# Altium PCB TruckCape for Hammond 1455K - Rev4.PcbDoc
Units mil, origin at the board's own origin, x right, y up, seen from the top; angles counter-clockwise.
Board outline 2952.76 x 4725.19 mil, 2 copper layers (Component Side, Bottom Layer), stack 12.8 mil thick; 39 components, 55 nets, 278 pads, 38 vias.
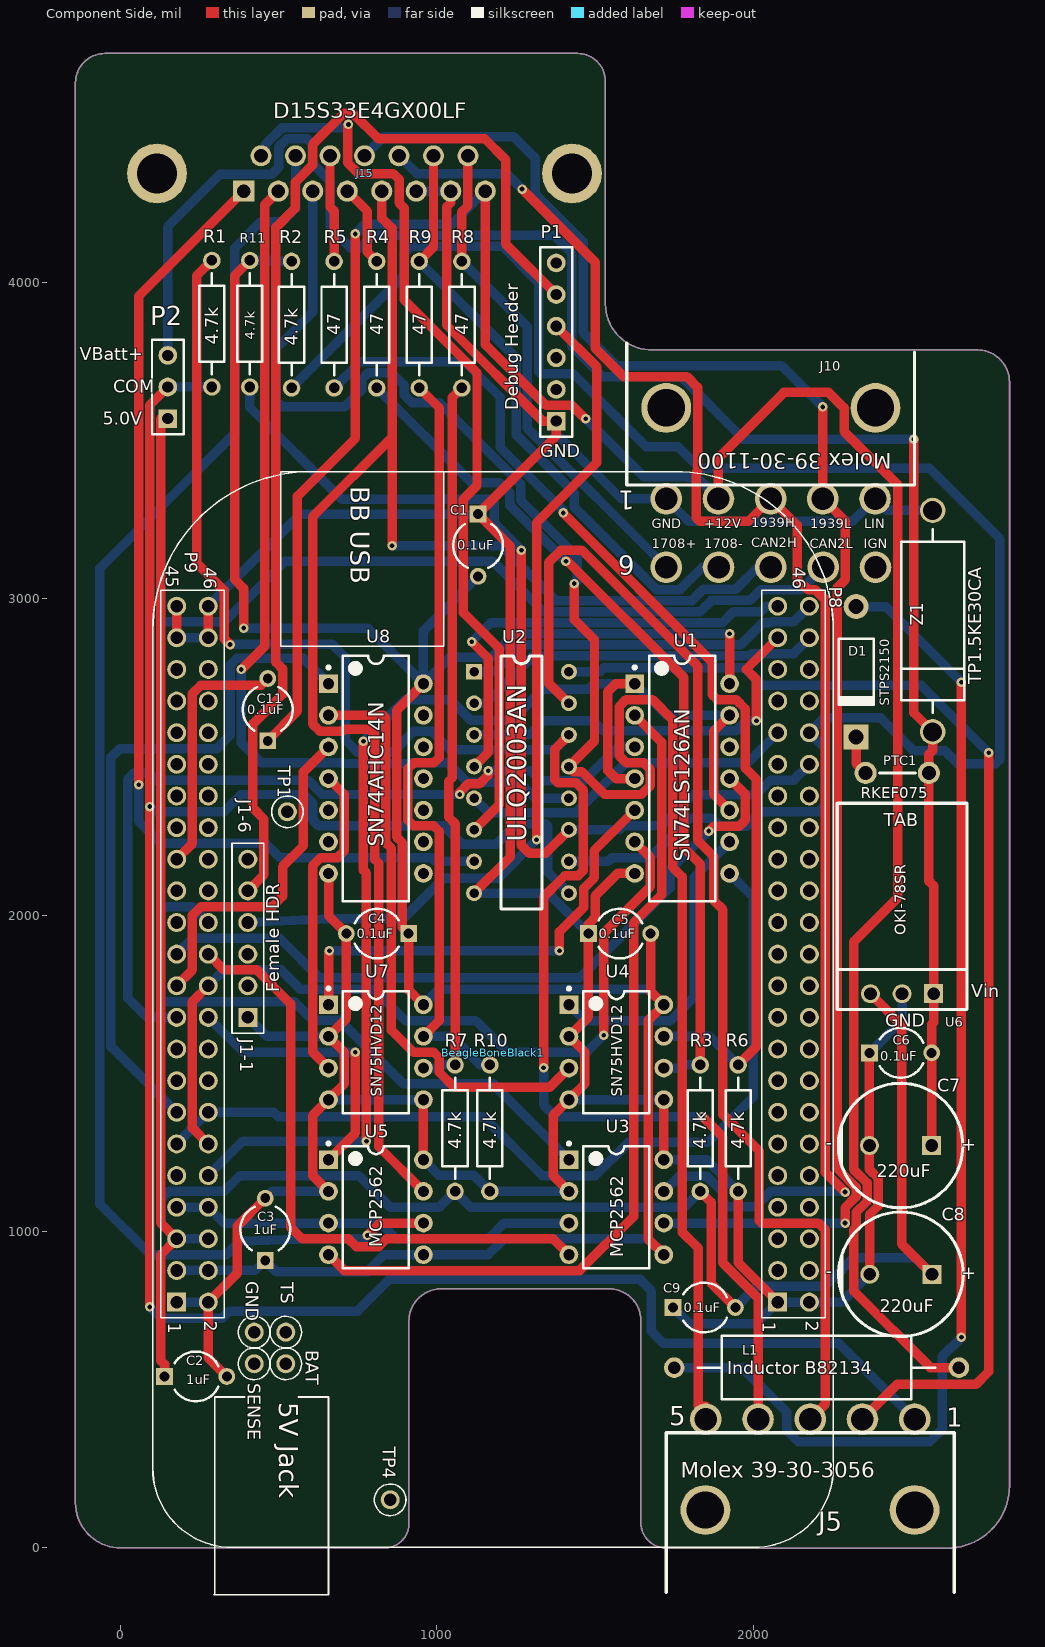
[diagram p0: Component Side view]
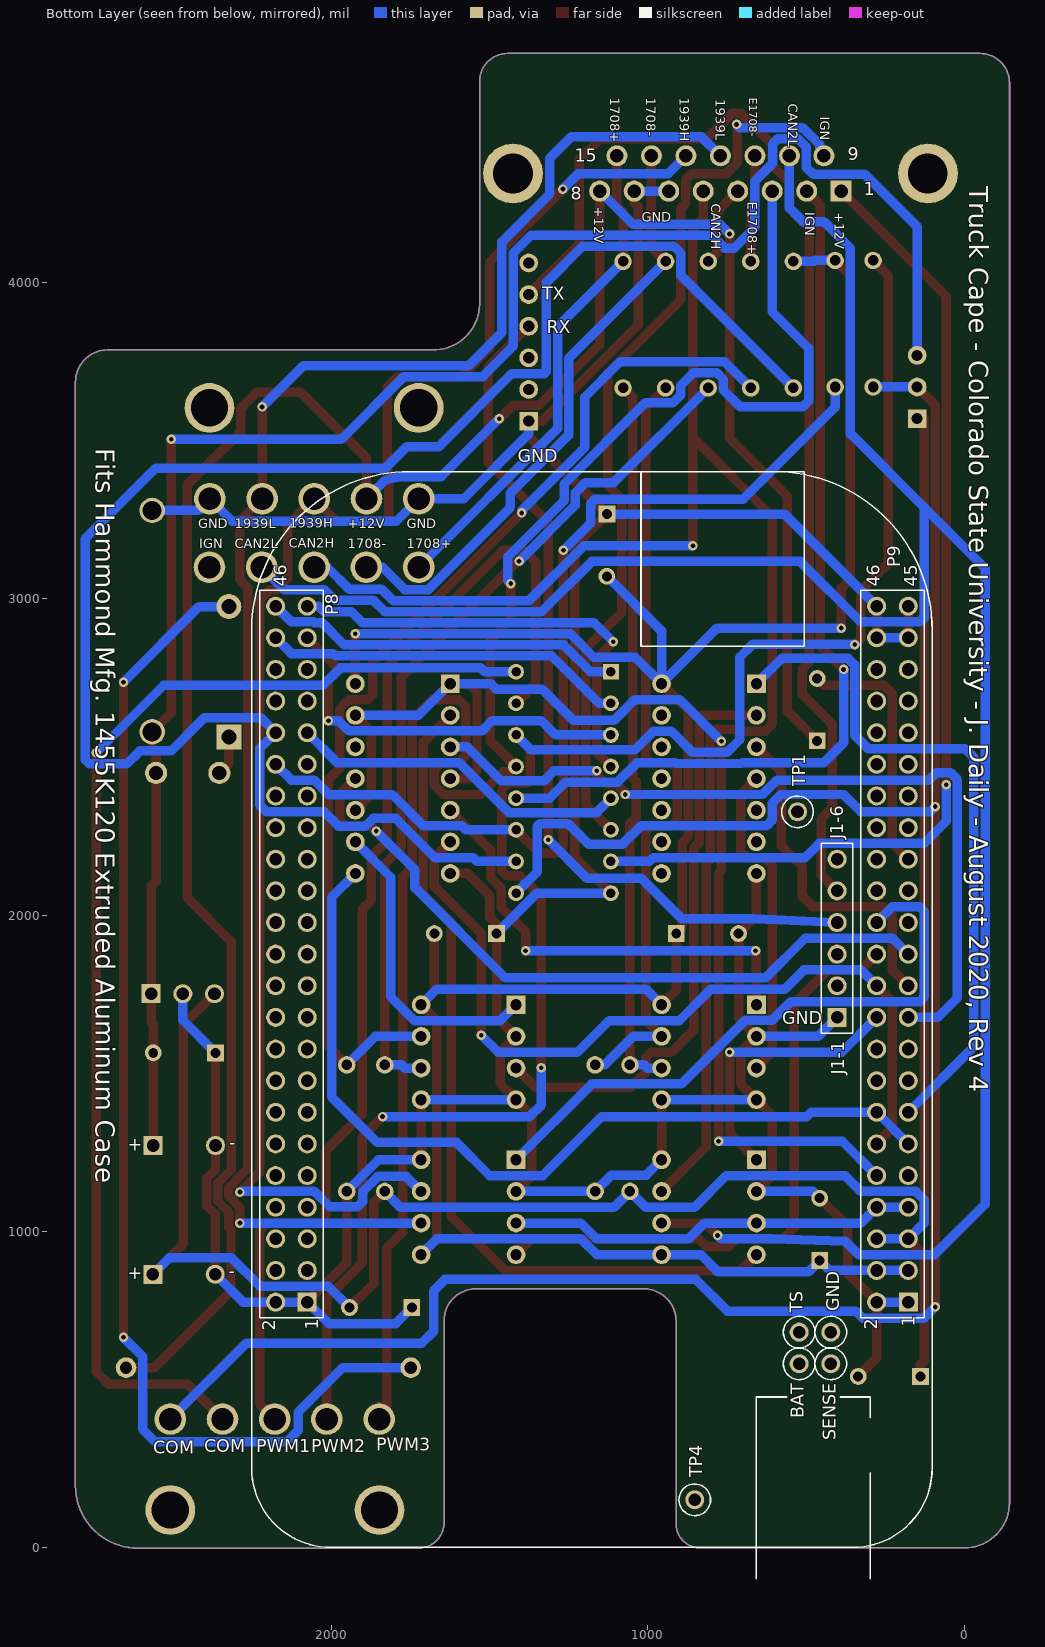
[diagram p1: Bottom Layer view, seen from below]

## Layer stack, top to bottom
Top Solder: solder mask 0.4, Solder Resist, Dk 3.5
Component Side: signal copper 1.4
Dielectric 1: core 10, FR-4, Dk 4.2
Bottom Layer: signal copper 1.4
Solder Side: solder mask 0.4, Solder Resist, Dk 3.5

## Board outline
0.17,0 cw(c0.17,143.03) -142.87,143.03 -142.87,4631.31 cw(c-49.77,4631.31) -49.77,4724.41 1444.44,4724.41 cw(c1444.44,4636.71) 1532.13,4636.71 1532.13,3931.45 1532.15,3931.45 ccw(c1678.95,3933.94) 1681.44,3787.14 1681.45,3787.13 2708.81,3787.13 cw(c2708.5,3685.75) 2809.89,3685.44 2809.89,196.07 cw(c2613.04,196.07) 2613.04,-0.78 1725.78,-0.78 cw(c1725.78,80.77) 1644.23,80.77 1644.23,719.01 ccw(c1544.23,719.01) 1544.23,819.01 1013.23,819.01 ccw(c1013.17,717.07) 911.23,717.13 911.23,76.23 cw(c835,76.23) 835,0

## Design rules (kind name [scope] priority, off if disabled: settings)
Clearance [All] p1: gap=5 ignorepadtopadclearanceinfootprint=FALSE except(0: Arc-Hole Track-Hole SMDPad-Hole THPad-Hole Via-Hole Fill-Hole Poly-Hole Region-Hole Text-Hole)
PolygonConnect [All] p1: connectstyle=Relief reliefconductorwidth=10 reliefentries=4 polygonreliefangle="90 Angle" airgapwidth=10
RoutingVias [All] p1: holewidth=15 width=30 viastyle="Through Hole" minholewidth=13 minwidth=20 maxholewidth=20 maxwidth=30
SolderMaskExpansion [All] p1: expansion=4
Width [All] p1: maxlimit=100 minlimit=10 preferedwidth=30 minimp=50.000000 maximp=50.000000 favimp=50.000000
30 further rules are at their usual default settings.

## Components (designator, comment, footprint, x,y, rotation, side; value= is the part's Value field where it differs from the comment)
BeagleBoneBlack1 "BeagleBoneBlack" Beagleboneblack -332.87,1530.63 r270 top locked
C1 "0.1uF" CAPR5-4X5 1130,3170 r270 top
C2 "1uF" CAPR5-4X5 237.13,542.13 r0 top
C3 "1uF" CAPR5-4X5 457.13,1007.13 r90 top
C4 "0.1uF" CAPR5-4X5 812.13,1942.13 r180 top
C5 "0.1uF" CAPR5-4X5 1577.13,1942.13 r0 top
C6 "0.1uF" CAPR5-4X5 2465.56,1565 r0 top
C7 "220uF" "Elec. Cap 5 x 10mm" 2563.98,1272.13 r180 top
C8 "220uF" "Elec. Cap 5 x 10mm" 2565,865 r180 top
C9 "0.1uF" CAPR5-4X5 1845,760 r0 top
C11 "0.1uF" CAPR5-4X5 465,2650 r90 top
D1 "STPS2150" DO-41 2325,2770 r270 top
J5 "Molex 39-30-3056" "5 POS MINI-FIT JR R/A Header" 2510,407.4 r0 top
J10 "10 Pos Mini-Fit Jr." "10 pos Mini-Fit Jr. R/A Header" 1724.82,3316.61 r180 top locked
J15 "Vehicle Interface" DB15 771.91,4401.02 r0 top
L1 "Inductor B82134" AXIAL-0.9 2200,570 r180 top
P1 "Use this part in J1-1 to J1-6" HDR1X6 1377.13,3562.13 r90 top
P2 "Header 3" HDR1X3 149.13,3570 r90 top
PTC1 "RKEF075" PTC 2480,2450 r0 top
R1 "4.7k" Axial-0.4 288.27,3870 r270 top
R2 "4.7k" Axial-0.4 540.4,3867.13 r90 top
R3 "4.7k" Axial-0.4 1832.13,1327.13 r270 top
R4 "47" Axial-0.4 809.55,3867.13 r90 top
R5 "47" Axial-0.4 674.97,3867.13 r90 top
R6 "4.7k" Axial-0.4 1952.13,1327.13 r270 top
R7 "4.7k" Axial-0.4 1057.13,1327.13 r270 top
R8 "47" Axial-0.4 1078.69,3867.13 r90 top
R9 "47" Axial-0.4 944.12,3867.13 r90 top
R10 "4.7k" Axial-0.4 1167.13,1327.13 r270 top
R11 "4.7k" Axial-0.4 408.27,3870 r90 top
U1 "SN74LS126AN" N14A 1775,2432.13 r0 top
U2 "ULQ2003AN" DIP16 1117.13,2770 r0 top
U3 "MCP2562" PDIP300-P8 1567.13,1077.13 r0 top locked
U4 "SN75HVD12" PDIP300-P8 1567.13,1567.13 r0 top locked
U5 "MCP2562" PDIP300-P8 807.13,1077.13 r0 top locked
U6 "OKI-78SR" OKI-78SR 2370.28,1752.13 r0 top
U7 "SN75HVD12" PDIP300-P8 807.13,1567.13 r0 top locked
U8 "SN74AHC14N" N14A 807.13,2432.13 r0 top locked
Z1 "TP1.5KE30CA" DIODE-0.7 2567.13,2930 r270 top

## Footprints (in the part's own frame and the unit in brackets; to place one, negate y for a bottom-side part, rotate by r counter-clockwise, add the part's x,y. Pads: shape width x height; smd on the part's side, far side on the other; paste and mask are expansions set on the pad)
"5 POS MINI-FIT JR R/A Header" [mil]
  round 157.48 hole 118.11: 0(-661.42,-287.4) 0(0,-287.4)
  round 100 hole 71: 1(0,0) 2(-165,0) 3(-330,0) 4(-495,0) 5(-660,0)
  silkscreen extent -785,-547 125,-43
"10 pos Mini-Fit Jr. R/A Header" [mil] "Molex 10 position Mini-Fit Jr. Right Angle Header with Pegs, Series 5569"
  round 157.48 hole 118.11: 0(-661.42,-287.4) 0(0,-287.4)
  round 100 hole 71: 1(0,0) 2(-165,0) 3(-330,0) 4(-495,0) 5(-660,0) 6(0,216.53) 7(-165.36,216.53) 8(-330.71,216.53) 9(-496.06,216.53) 10(-661.42,216.53)
  silkscreen extent -785,-491 125,-43
Axial-0.4 [mm] "Axial Device, Thru-Hole; 2 Leads; 0.4 in Pin Spacing"
  round 1.4 hole 0.85: 1(-5.08,0) 2(5.08,0)
  silkscreen extent -4.06,-1.02 4.06,1.02
AXIAL-0.9 [mm] "Axial Device, Thru-Hole; 2 Leads; 0.9 in Pin Spacing"
  round 1.65 hole 1: 1(-11.43,0) 2(11.43,0)
  silkscreen extent -9.53,-2.54 9.53,2.54
Beagleboneblack [mil] "Flipped Headers, testpoints and Overlay for a BBB Rev C"
  rect 60x60 hole 40 mask+2: 1(753.5,510) J1-1(-146.5,735) P1(753.5,2410)
  round 60 hole 40 mask+2: 2(753.5,610) 3(653.5,510) 4(653.5,610) 5(553.5,510) 6(553.5,610) 7(453.5,510) 8(453.5,610) 9(353.5,510) 10(353.5,610) 11(253.5,510) 12(253.5,610) 13(153.5,510) 14(153.5,610) 15(53.5,510) 16(53.5,610) 17(-46.5,510) 18(-46.5,610) 19(-146.5,510) 20(-146.5,610) 21(-246.5,510) 22(-246.5,610) 23(-346.5,510) 24(-346.5,610) 25(-446.5,510) 26(-446.5,610) 27(-546.5,510) 28(-546.5,610) 29(-646.5,510) 30(-646.5,610) 31(-746.5,510) 32(-746.5,610) 33(-846.5,510) 34(-846.5,610) 35(-946.5,510) 36(-946.5,610) 37(-1046.5,510) 38(-1046.5,610) 39(-1146.5,510) 40(-1146.5,610) 41(-1246.5,510) 42(-1246.5,610) 43(-1346.5,510) 44(-1346.5,610) 45(-1446.5,510) 46(-1446.5,610) J1-2(-246.5,735) J1-3(-346.5,735) J1-4(-446.5,735) J1-5(-546.5,735) J1-6(-646.5,735) P2(753.5,2510) P3(653.5,2410) P4(653.5,2510) P5(553.5,2410) P6(553.5,2510) P7(453.5,2410) P8(453.5,2510) P9(353.5,2410) P10(353.5,2510) P11(253.5,2410) P12(253.5,2510) P13(153.5,2410) P14(153.5,2510) P15(53.5,2410) P16(53.5,2510) P17(-46.5,2410) P18(-46.5,2510) P19(-146.5,2410) P20(-146.5,2510) P21(-246.5,2410) P22(-246.5,2510) P23(-346.5,2410) P24(-346.5,2510) P25(-446.5,2410) P26(-446.5,2510) P27(-546.5,2410) P28(-546.5,2510) P29(-646.5,2410) P30(-646.5,2510) P31(-746.5,2410) P32(-746.5,2510) P33(-846.5,2410) P34(-846.5,2510) P35(-946.5,2410) P36(-946.5,2510) P37(-1046.5,2410) P38(-1046.5,2510) P39(-1146.5,2410) P40(-1146.5,2510) P41(-1246.5,2410) P42(-1246.5,2510) P43(-1346.5,2410) P44(-1346.5,2510) P45(-1446.5,2410) P46(-1446.5,2510) TP1(-796.5,860) TP4(1378.5,1185) TP5(948.5,855) TP6(948.5,755) TP7(848.5,855) TP8(848.5,755)
  silkscreen extent -1872,434 1678,2586
CAPR5-4X5 [mm] "Capacitor; 2 Leads"
  rect 1.35x1.35 hole 0.8: 1(-2.5,0)
  round 1.35 hole 0.8: 2(2.5,0)
  silkscreen extent -1.69,-2 1.82,2
DB15 [mm]
  rect 1.69x1.69 hole 1.09: 1(-9.72,-2.843)
  round 1.69 hole 1.09: 2(-6.95,-2.843) 3(-4.18,-2.843) 4(-1.41,-2.843) 5(1.36,-2.843) 6(4.13,-2.843) 7(6.9,-2.843) 8(9.67,-2.843) 9(-8.335,-0.003) 10(-5.565,-0.003) 11(-2.795,-0.003) 12(-0.025,-0.003) 13(2.745,-0.003) 14(5.515,-0.003) 15(8.285,-0.003)
  round 4.8 hole 3.18: 16(-16.685,-1.423) 17(16.635,-1.423)
DIODE-0.7 [mil] "Diode, Thru-Hole; 2 Leads; 0.7 in Pin Spacing"
  round 80 hole 60: 1(-350,0) 2(350,0)
  silkscreen extent -290,-100 290,100
DIP16 [mil]
  rect 50x50 hole 30: 1(0,0)
  round 50 hole 30: 2(0,-100) 3(0,-200) 4(0,-300) 5(0,-400) 6(0,-500) 7(0,-600) 8(0,-700) 9(300,-700) 10(300,-600) 11(300,-500) 12(300,-400) 13(300,-300) 14(300,-200) 15(300,-100) 16(300,0)
  silkscreen extent 85,-750 215,50
DO-41 [mm] "Diode, Axial; Body 5.2 x 2.7 mm (LxDia. max), Lead Dia. 0.86 mm (max)"
  round 2 hole 1.2: 1(-5.23,0)
  rect 2x2 hole 1.2: 2(5.23,0)
  silkscreen extent -2.65,-1.4 2.75,1.4
"Elec. Cap 5 x 10mm" [mil] "2 lead polarized Radial Capacitor with 5 mm lead spacing and 10 mm diameter can"
  rect 60x60 hole 40: 1(0,0)
  round 60 hole 40: 2(196.85,0)
  silkscreen extent -98,-197 295,197
HDR1X3 [mm] "Connector; Header; 3 Position"
  rect 1.5x1.5 hole 0.9: 1(0,0)
  round 1.5 hole 0.9: 2(2.54,0) 3(5.08,0)
  silkscreen extent -1.27,-1.27 6.35,1.27
HDR1X6 [mm] "Connector; Header; 6 Position"
  rect 1.5x1.5 hole 0.9: 1(0,0)
  round 1.5 hole 0.9: 2(2.54,0) 3(5.08,0) 4(7.62,0) 5(10.16,0) 6(12.7,0)
  silkscreen extent -1.27,-1.27 13.97,1.27
N14A [mm] "DIP, 14-Leads, Row Spacing 7.62mm, Pitch 2.54mm, Body 19.18x6.35mm"
  rect 1.5x1.5 hole 0.9: 1(-3.81,7.62)
  round 1.5 hole 0.9: 2(-3.81,5.08) 3(-3.81,2.54) 4(-3.81,0) 5(-3.81,-2.54) 6(-3.81,-5.08) 7(-3.81,-7.62) 8(3.81,-7.62) 9(3.81,-5.08) 10(3.81,-2.54) 11(3.81,0) 12(3.81,2.54) 13(3.81,5.08) 14(3.81,7.62)
  silkscreen extent -3.93,-9.85 2.65,9.85, body extent -3.55,-9.85 3.55,9.85, height 5.08
OKI-78SR [mil] "Horizontal Mount SIP DC/DC Converter"
  rect 60x60 hole 40: 1(200,0)
  round 60 hole 40: 2(100,0) 3(0,0)
  silkscreen extent -105,-50 305,602
PDIP300-P8 [mm] "DIP, 8-Leads, Row Spacing 7.62mm, Pitch 2.54mm, Body 9.5x6.6mm"
  rect 1.5x1.5 hole 0.9: 1(-3.81,3.81)
  round 1.5 hole 0.9: 2(-3.81,1.27) 3(-3.81,-1.27) 4(-3.81,-3.81) 5(3.81,-3.81) 6(3.81,-1.27) 7(3.81,1.27) 8(3.81,3.81)
  silkscreen extent -3.93,-4.9 2.65,5.23, body extent -3.55,-4.9 3.55,4.9, height 4.32
PTC [mil] "TE RGEF600-2"
  round 70 hole 45: 1(-125,0) 2(75,0)
  silkscreen extent -80,0 33,0

## Part data
BeagleBoneBlack1: "46 Positions Header, Breakaway Connector 0.100\" (2.54mm) Through Hole Tin", Manufacturer="Sullins Connector Solutions", PartNumber=PREC023DAAN-RC, Supplier Part Number 1=S2012EC-23-ND, Supplier 1=Digi-Key
C1 C4 C5 C6 C9 C11: library part Cap, "CAP CER 0.1UF 100V X7R RADIAL", Manufacturer="Vishay BC Components", PartNumber=K104K20X7RH53H5, Supplier Part Number 1=BC5139-ND, Supplier 1=Digi-Key
C2 C3: library part Cap, "CAP CER 1UF 100V X7R RADIAL", Manufacturer="Murata Electronics North America", PartNumber=RDER72A105K2M1H03A, Supplier Part Number 1=490-9198-1-ND, Supplier 1=Digi-Key
C7 C8: library part "Electrolytic Cap", "220µF 50V Aluminum Electrolytic Capacitors Radial, Can 175 mOhm @ 10kHz 5000 Hrs @ 105°C", Manufacturer="EPCOS (TDK)", PartNumber=B41858C6227M000, Supplier Part Number 1=495-6000-ND, Supplier 1=Digi-Key
D1: library part "Diode 1N4003", "Diode Schottky 150V 2A Through Hole DO-15", Manufacturer=STMicroelectronics, Supplier Part Number 1=497-3213-1-ND, PartNumber=STPS2150, Supplier 1=Digi-Key
J5: library part "5 Pos Header", "5 Positions Header Connector 0.165\" (4.20mm) Through Hole - Right Angle Tin", Manufacturer=Molex, PartNumber=39-30-3055, Supplier Part Number 1=WM18448-ND, Supplier 1=Digi-Key
J10: library part "10 Pos Header", "10 Positions Header Connector 0.165\" (4.20mm) Through Hole - Right Angle Tin", Manufacturer=Molex, PartNumber=39-30-1100, Supplier Part Number 1=WM1355-ND, Supplier 1=Digi-Key
J15: library part 788781-2, "Receptacle Assembly, 15 Position, Right Angle, 8.08mm Series, Amplimite, with Screwlocks", Manufacturer="Amphenol FCI", PartNumber=D15S33E4GX00LF, Supplier Part Number 1=609-1499-ND, Supplier 1=Digi-Key
L1: library part "Inductor Iron", "Magnetic-Core Inductor", Manufacturer="TDK Electronics Inc.", PartNumber=B82134A5701M000, Supplier Part Number 1=495-76036-1-ND, Supplier 1=Digi-Key
P1: library part "Header 6", "CONN HEADER FEMALE 6POS .1\" GOLD", Manufacturer="Sullins Connector Solutions", PartNumber=PPPC061LFBN-RC, Supplier Part Number 1=S7039-ND, Supplier 1=Digi-Key
P2: "2 (1 x 2) Position Shunt Connector Black Open Top 0.100\" (2.54mm) Gold", Manufacturer="Sullins Connector Solutions", PartNumber=QPC02SXGN-RC, Supplier Part Number 1=S9337-ND, Supplier 1=Digi-Key
PTC1: library part "SMD Resistor", "Polymeric PTC Resettable Fuse 60V 750mA Ih Through Hole Radial, Disc", Manufacturer="Littelfuse Inc.", Supplier Part Number 1=RKEF075HF-ND, PartNumber=RKEF075, Supplier 1=Digi-Key
R1 R2 R3 R6 R7 R10 R11: library part "Chip Resistor", "RES SMD 4.7K OHM 1% 1/10W 0603", Manufacturer=Yageo, PartNumber=CFR-25JB-52-4K7, Supplier Part Number 1=4.7KQBK-ND, Supplier 1=Digi-Key
R4 R5 R8 R9: library part "Chip Resistor", "47 Ohms ±5% 0.25W, 1/4W Through Hole Resistor Axial  Carbon Film", Manufacturer=Yageo, PartNumber=CFR-25JB-52-47R, Supplier Part Number 1=47QBK-ND, Supplier 1=Digi-Key
U1: library part DM74LS126AN, "Quad 3-State Buffer", Manufacturer="Texas Instruments", Supplier Part Number 1=296-3643-5-ND, PartNumber=SN74LS126AN, Supplier 1=Digi-Key
U2: library part ULQ2003, "High voltage, high current Darlington arrays each containing seven open collector Darlington pairswith common emitters.", Manufacturer="Texas Instruments", Supplier Part Number 1=296-22623-5-ND, PartNumber=ULQ2003AN, Supplier 1=Digi-Key
U3 U5: library part SN65HVD232DR, "1/1 Transceiver Half CAN 8-PDIP", Manufacturer="Microchip Technology", PartNumber=MCP2562-E/P, Supplier Part Number 1=MCP2562-E/P-ND, Supplier 1=Digi-Key
U4 U7: library part "SN75HVD12D (3.3v RS485)", "IC 3.3V DIFF TXRX 8-SOIC", Manufacturer="Texas Instruments", PartNumber=SN75HVD12P, Supplier Part Number 1=296-14047-5-ND, Supplier 1=Digi-Key
U6: library part 7805, "5V DC/DC Converter (7805 replacement)", Manufacturer="Murata Power Solutions Inc.", PartNumber=OKI-78SR-5/1.5-W36H-C, Supplier Part Number 1=811-2692-ND, Supplier 1=Digi-Key
U8: library part "74VHC14 Hex Inverter", "Inverter IC 6 Channel Schmitt Trigger 14-PDIP", Manufacturer="Texas Instruments", Supplier Part Number 1=296-4550-5-ND, PartNumber=SN74AHC14N, Supplier 1=Digi-Key
Z1: library part Zener, "TVS DIODE 25.6V 41.4V DO201", Manufacturer="Littelfuse Inc.", Supplier Part Number 1=F7610CT-ND, PartNumber=TP1.5KE30CA, Supplier 1=Digi-Key

## Via types
v1: diameter 30, hole 15, Component Side to Bottom Layer, 38 vias

## Nets (pads, with @x,y where several pads share a name; then routed paths per layer and width w, separated by ;. In a path a pad name is that pad's centre, name@x,y a point inside that pad or via, vN(x,y) a via of type N, cw(c..) or ccw(c..) an arc to the next point about the centre after c; other vN are vias at no path point)
3V3: BeagleBoneBlack1.3 BeagleBoneBlack1.4 C1.2 C3.1 C4.1 C5.2 R2.2 R11.2 U1.14 U3.5 U4.8 U5.5 U7.8 U8.14 | length 8161.3
  Component Side w30: v1(388.8,2907.95) 388.8,3033.32 359.98,3062.13 359.98,4021.71 R11.2 ; U7.8 910.56,1763.71 C4.1 890.98,1961.71 890.98,2229.23 872.61,2247.6 872.61,2647.6 U8.14 ; C5.2 1675.56,1758.71 U4.8 1667.61,1667.6 1667.61,976.66 U3.5 ; U1.14 v1(1925,2889.76)
  Bottom Layer w30: BeagleBoneBlack1.3 BeagleBoneBlack1.4 425.56,877.13 C3.1 493.08,872.76 778.98,872.76 833.35,927.13 U5.5 1161.98,927.13 1211.61,976.76 1667.5,976.76 U3.5 ; v1(388.8,2907.95) 781.32,2907.95 U8.14 ; R11.2 471.98,4070 474.85,4067.13 R2.2 ; U7.8 1006.76,1766.76 1667.5,1766.76 U4.8 ; C1.2 957.13,2898.71 U8.14 ; v1(1925,2889.76) 1245.46,2889.76 1171.46,2815.76 1040.76,2815.76 U8.14
5V0: BeagleBoneBlack1.5 BeagleBoneBlack1.6 C2.1 C8.1 C9.2 P2.1 R3.2 R7.2 U6.3 | length 7270.4
  Component Side w30: C2.1 138.71,580.04 126.98,591.76 126.98,926.98 BeagleBoneBlack1.5 126.98,1027.28 126.98,3570 P2.1 ; R3.2 1867.11,1092.16 1867.11,836.32 C9.2 ; U6.3 2468.98,1653.43 2468.98,961.02 C8.1
  Bottom Layer w30: BeagleBoneBlack1.6 BeagleBoneBlack1.5 126.98,1027.28 126.98,1100.76 153.35,1127.13 326.98,1127.13 376.61,1176.76 752.98,1176.76 852.98,1076.76 1006.76,1076.76 R7.2 1107.5,1076.76 1781.76,1076.76 R3.2 ; C9.2 2010.56,827.13 2226.98,827.13 2316.61,916.76 2513.24,916.76 C8.1
12V0: C6.2 C7.1 P2.3 PTC1.2 U6.1 Z1.2 | length 5909.9
  Component Side w30: v1(2506.98,3504.76) 2506.98,2640.15 Z1.2 2567.13,2520.9 2555,2508.76 PTC1.2 2555,2108.04 2570.28,2092.76 U6.1 2570.28,1661.06 2563.98,1654.76 C6.2 C7.1
  Bottom Layer w30: P2.3 149.13,4176.91 314.98,4342.76 477.98,4342.76 499.53,4364.31 499.53,4428.76 524.94,4454.17 589.98,4454.17 606.06,4438.09 606.06,4376.68 661.98,4320.76 661.98,4174.76 727.98,4108.76 755.98,4108.76 796.98,4149.76 1369.66,4149.76 1426.66,4092.76 1426.66,3798.62 1522.52,3702.76 1770.99,3702.76 1968.98,3504.76 v1(2506.98,3504.76)
CAN2H: J10.8 J15.5 U5.7 | length 5181.9
  Component Side w30: J15.5 825.43,4203.76 857.98,4171.21 857.98,3510.76 ; v1(857.98,3167.76) 857.98,3510.76 ; U5.7 815.98,1268.28 815.98,2164.23 802.61,2177.6 802.61,2572.76 786.61,2588.76 706.98,2588.76 699.98,2581.76 629.98,2581.76 606.98,2604.76 606.98,3259.76 857.98,3510.76
  Bottom Layer w30: v1(857.98,3167.76) 1202.98,3167.76 1375.98,2994.76 1805.98,2994.76 1841.3,3030.08 1943.98,3030.08 2013.98,3100.08 J10.8
CAN2L: J10.9 J15.10 U5.6 | length 7388.3
  Component Side w30: v1(779.98,987.76) 819.35,1027.13 U5.6
  Bottom Layer w30: J15.10 552.8,4235.58 509.98,4192.76 443.98,4192.76 359.98,4108.76 359.98,3522.76 126.98,3289.76 ; v1(779.98,987.76) 768.98,976.76 611.98,976.76 375.98,968.76 334.35,927.13 93.98,927.13 -66.02,1087.13 -66.02,3096.76 126.98,3289.76 ; J10.9 2150.56,3029.76 2023.69,3029.76 1989.01,2995.08 1867.62,2995.08 1832.31,2959.76 1335.98,2959.76 1176.98,3118.76 518.98,3118.76 327.35,2927.13 140.61,2927.13 126.98,2940.76 126.98,3289.76
COM: J5.1 P2.2 R1.2 U2.9 | length 7465.4
  Component Side w30: v1(91.98,761.76) v1(91.98,2343.76) 91.98,3612.85 P2.2
  Bottom Layer w30: v1(91.98,761.76) 126.98,726.76 320.98,726.76 342.98,748.76 748.98,748.76 848.98,848.76 1641.98,848.76 1677.98,812.76 1677.98,684.76 1714.98,647.76 2269.64,647.76 J5.1 ; v1(91.98,2343.76) 108.61,2327.13 326.98,2327.13 381.61,2381.76 579.78,2381.76 607.61,2353.93 607.61,2300.76 625.76,2282.6 1022.14,2282.6 1079.98,2224.76 1187.98,2224.76 1252.98,2289.76 1341.98,2289.76 1349.98,2281.76 1349.98,2137.15 U2.9 ; P2.2 R1.2
DEBUGRX: BeagleBoneBlack1.J1-4 P1.4 | length 2771.7
  Component Side w30: v1(1314.98,2238.76) 1314.98,3240.79 1505,3430.81 1505,3734.27 P1.4
  Bottom Layer w30: BeagleBoneBlack1.J1-4 666.98,1988.76 892.98,1988.76 1021.98,2117.76 1193.98,2117.76 v1(1314.98,2238.76)
DEBUGTX: BeagleBoneBlack1.J1-5 P1.5 | length 3695.1
  Component Side w30: BeagleBoneBlack1.J1-5 452.98,2127.98 452.98,2303.76 417.98,2338.76 417.98,2604.76 511.98,2698.76 511.98,2778.76 490.83,2799.92 490.83,4174.61 551.98,4235.76 551.98,4316.76 606.98,4371.76 606.98,4436.48 705.5,4535 734.5,4535 814.74,4454.76 1150.98,4454.76 1216.98,4388.76 1216.98,4122.28 P1.5
EJ1708+: J15.4 R4.2 | length 260.6
  Component Side w30: J15.4 779.5,4225.98 779.5,4097.18 R4.2
EJ1708-: J15.11 R5.2 | length 339.2
  Component Side w30: J15.11 661.85,4239.89 674.98,4226.76 R5.2
GND: BeagleBoneBlack1.1 BeagleBoneBlack1.2 BeagleBoneBlack1.43 BeagleBoneBlack1.44 BeagleBoneBlack1.45 BeagleBoneBlack1.46 BeagleBoneBlack1.J1-1 BeagleBoneBlack1.P1 BeagleBoneBlack1.P2 C1.1 C2.2 C3.2 C4.2 C5.1 C6.1 C7.2 C8.2 C9.1 J10.1 J10.5 J15.6 J15.7 P1.1 R6.2 R10.2 U1.7 U2.8 U3.2 U3.8 U4.2 U4.4 U4.5 U5.2 U5.8 U6.2 U7.2 U7.4 U7.5 U8.7 Z1.1 | length 13182.3
  Component Side w30: BeagleBoneBlack1.43 BeagleBoneBlack1.45 ; BeagleBoneBlack1.44 BeagleBoneBlack1.46 ; C2.2 277.13,600.56 BeagleBoneBlack1.2 367.98,867.98 367.98,1016.41 C3.2 ; U5.2 606.98,1177.28 606.98,1366.98 U7.4 706.98,1466.98 706.98,1567.28 U7.2 713.71,1673.71 C4.2 657.13,1998.71 U8.7 ; U5.8 U7.5 ; J15.7 1043.54,4252.32 1030.98,4239.76 1030.98,3865.27 1334.12,3562.13 P1.1 1377.13,3515.56 C1.1 1232.13,3166.29 1232.13,2185 U2.8 ; U3.2 1366.98,1177.28 1366.98,1366.98 U4.4 1466.98,1466.98 1466.98,1567.28 U4.2 1478.71,1678.71 C5.1 1478.71,1971.57 1499.63,1992.5 1499.63,2060.69 1571.07,2132.13 U1.7 ; U3.8 U4.5 ; R6.2 1952.13,902.13 BeagleBoneBlack1.P1 ; C6.1 C7.2 2367.13,1196.36 2395,1168.49 2395,1081.51 2368.15,1054.66 C8.2
  Bottom Layer w30: BeagleBoneBlack1.1 BeagleBoneBlack1.2 ; BeagleBoneBlack1.43 BeagleBoneBlack1.44 ; BeagleBoneBlack1.46 568.43,3268.43 C1.1 ; BeagleBoneBlack1.J1-1 462.13,1617.13 U7.2 ; C3.2 478.71,1127.13 U5.2 ; U7.4 U7.5 ; J15.6 J15.7 ; U5.8 1005.5,1178.76 1115.5,1178.76 R10.2 U3.2 ; U2.8 1350.84,2070 C5.1 ; P1.1 1377.13,3521.86 1582.38,3316.61 J10.1 1795.67,3245.76 2313.97,3245.76 J10.5 2421.43,3280 Z1.1 ; U4.4 U4.5 ; U3.8 1852.13,1227.13 R6.2 ; C9.1 1797.81,708.76 2008.76,708.76 BeagleBoneBlack1.P1 BeagleBoneBlack1.P2 2280.28,777.13 C8.2 ; C6.1 2470.28,1668.15 U6.2
J1708+: J10.6 J15.15 R8.2 | length 1576.5
  Component Side w30: R8.2 1078.69,4223.76 1098.07,4243.14 J15.15
  Bottom Layer w30: R8.2 1285.98,3859.84 1285.98,3538.91 J10.6
J1708-: J10.7 J15.14 R9.2 | length 1925.7
  Component Side w30: R9.2 989.02,4112.03 J15.14
  Bottom Layer w30: R9.2 1250.98,3760.27 1250.98,3518.12 1434.67,3334.43 1434.67,3289.07 1693.98,3029.76 1768.67,3029.76 1838.98,3100.08 J10.7
J1939H: J10.3 J15.13 U3.7 | length 5064.4
  Component Side w30: v1(1268.98,4295.76) 1499.98,4064.76 1499.98,3792.76 1589.98,3702.76 1789.98,3702.76 1823.98,3668.76 1823.98,3404.76 1818.98,3399.76 1818.98,3256.76 1829.98,3245.76 1983.97,3245.76 J10.3 2138.98,3232.45 2138.98,3063.76 2173.98,3028.76 2196.21,3028.76 2227.13,2997.84 2227.13,1187.87 v1(2290,1125)
  Bottom Layer w30: J15.13 936.1,4344.76 1219.98,4344.76 v1(1268.98,4295.76) ; U3.7 1764.69,1174.69 1853.98,1174.69 1901.69,1126.98 1901.69,1095.05 1917.98,1078.76 2005.98,1078.76 2054.35,1127.13 2287.87,1127.13 v1(2290,1125)
J1939L: J10.4 J15.12 U3.6 | length 5293.4
  Component Side w30: v1(2219.82,3606.93) J10.4 2290.98,3245.45 2290.98,3061.76 2265.63,3036.41 2265.63,1198.87 2325,1139.5 2325,1110.5 2290,1075.5 v1(2290,1027.13)
  Bottom Layer w30: J15.12 830.76,4460.76 1242.98,4460.76 1309.98,4393.76 1309.98,4280.76 1461.98,4128.76 1461.98,3841.76 1565.98,3737.76 2088.98,3737.76 v1(2219.82,3606.93) ; U3.6 v1(2290,1027.13)
NetBeagleBoneBlack1_9: BeagleBoneBlack1.9
NetBeagleBoneBlack1_10: BeagleBoneBlack1.10 U1.1 U1.4 U1.10 U1.13 | length 3922.6
  Component Side w30: v1(767.61,2549.76) 767.61,2142.6 776.98,2133.23 v1(776.98,1285.76) ; U1.4 1565.98,2432.13 1540.47,2457.64 1540.47,2707.15 1565.45,2732.13 U1.1 ; U1.10 1874.98,2382.15 1874.98,2582.11 U1.13
  Bottom Layer w30: BeagleBoneBlack1.10 385.76,1285.76 v1(776.98,1285.76) ; v1(767.61,2549.76) 899.5,2681.66 1041.66,2681.66 1107.56,2615.76 1235.78,2615.76 1335.01,2715 1480,2715 1497.13,2732.13 U1.1 1725,2632.13 U1.13
NetBeagleBoneBlack1_11: BeagleBoneBlack1.11 BeagleBoneBlack1.14 U1.8 | length 2787.9
  Bottom Layer w30: BeagleBoneBlack1.11 177.13,1277.28 276.98,1377.13 BeagleBoneBlack1.14 484.61,1377.13 497.98,1363.76 1145.98,1363.76 1332.98,1176.76 1499.98,1176.76 1604.98,1281.76 1855.98,1281.76 1999.98,1425.76 1999.98,2057.15 U1.8
NetBeagleBoneBlack1_12: BeagleBoneBlack1.12 BeagleBoneBlack1.22 U1.6 | length 2635.6
  Component Side w30: BeagleBoneBlack1.12 227.13,1327.13 227.13,1727.13 BeagleBoneBlack1.22 ; v1(1526.98,1620.76) 1526.98,1942.64 1674.98,2090.64 1674.98,2182.15 U1.6
  Bottom Layer w30: BeagleBoneBlack1.22 327.13,1827.13 506.98,1827.13 567.35,1766.76 800.98,1766.76 900.98,1666.76 1122.98,1666.76 1222.98,1566.76 1472.98,1566.76 v1(1526.98,1620.76)
NetBeagleBoneBlack1_13: BeagleBoneBlack1.13 U8.1 | length 2188.4
  Bottom Layer w30: BeagleBoneBlack1.13 -30.52,1584.78 -30.52,2498.76 -2.15,2527.13 304.35,2527.13 346.61,2569.39 346.61,2791.63 367.11,2812.13 577.13,2812.13 U8.1
NetBeagleBoneBlack1_19: BeagleBoneBlack1.19 U1.3 | length 2612.1
  Component Side w30: v1(1072.13,2381.76) 1072.13,2388.64 1098.49,2415 1133.98,2415 1161.98,2443 v1(1161.98,2456.76)
  Bottom Layer w30: BeagleBoneBlack1.19 83.98,1677.13 21.98,1739.13 21.98,2428.76 43.98,2450.76 88.35,2450.76 111.98,2427.13 592.09,2427.13 637.46,2381.76 v1(1072.13,2381.76) ; v1(1161.98,2456.76) 1296.98,2456.76 1328.98,2424.76 1463.98,2424.76 1571.35,2532.13 U1.3
NetBeagleBoneBlack1_20: BeagleBoneBlack1.20 U5.1 | length 885.3
  Component Side w30: U5.1 741.98,1311.98 v1(741.98,1566.76)
  Bottom Layer w30: BeagleBoneBlack1.20 387.5,1566.76 v1(741.98,1566.76)
NetBeagleBoneBlack1_21: BeagleBoneBlack1.21 U8.3 | length 1085.3
  Component Side w30: BeagleBoneBlack1.21 227.13,1827.13 227.13,2000.28 253.98,2027.13 478.35,2027.13 511.98,2060.76 511.98,2153.76 577.98,2219.76 577.98,2452.98 U8.3
NetBeagleBoneBlack1_23: BeagleBoneBlack1.23 U1.11 | length 2262.1
  Component Side w30: v1(1859.23,2266.01) 1874.98,2281.76 1955.98,2281.76 1974.98,2300.76 1974.98,2382.15 U1.11
  Bottom Layer w30: BeagleBoneBlack1.23 227.13,1927.13 502.98,1927.13 628.35,1801.76 1450.98,1801.76 1736.98,2087.76 1736.98,2143.76 v1(1859.23,2266.01)
NetBeagleBoneBlack1_24: BeagleBoneBlack1.24 U3.4 | length 1967.7
  Component Side w30: BeagleBoneBlack1.24 327.13,1827.13 430.61,1827.13 537.98,1719.76 537.98,1012.76 573.98,976.76 720.81,976.76 745.05,952.52 815.47,952.52 839.71,976.76 1367.5,976.76 U3.4
NetBeagleBoneBlack1_26: BeagleBoneBlack1.26 U3.1 | length 1951.7
  Bottom Layer w30: BeagleBoneBlack1.26 227.13,2027.13 141.35,2027.13 126.98,2012.76 126.98,1740.76 140.61,1727.13 548.08,1727.13 607.61,1667.6 693.14,1667.6 893.98,1466.76 1177.5,1466.76 U3.1
NetD1_1: D1.1 L1.2 | length 3812.9
  Component Side w30: v1(2657.98,665.76) v1(2657.98,2736.76)
  Bottom Layer w30: L1.2 1964.74,570 2105.98,428.76 2105.98,371.76 2141.98,335.76 2557.98,335.76 2596.98,374.76 2596.98,604.76 v1(2657.98,665.76) ; D1.1 2418.84,2975.91 v1(2657.98,2736.76)
NetD1_2: D1.2 PTC1.1 | length 126.5
  Component Side w30: D1.2 2325,2480 PTC1.1
NetR3_1: R3.1 R4.1 U4.6 | length 2737.9
  Component Side w30: v1(1407.68,3118.76) 1413.48,3118.76 1780.48,2751.76 1780.48,2213.26 1832.13,2161.61 R3.1
  Bottom Layer w30: R4.1 1108.8,3367.88 1197.19,3367.88 1229.69,3335.38 1229.69,3296.75 v1(1407.68,3118.76) ; U4.6 1768.98,1517.13 1778.98,1527.13 R3.1
NetR5_1: R5.1 R6.1 U4.7 | length 3382.8
  Component Side w30: v1(1398.98,3271.76) 1869.98,2800.76 1869.98,2697.76 1885.98,2681.76 1945.41,2681.76 1974.53,2652.65 1974.53,2465.22 2009.98,2429.76 2009.98,1584.98 R6.1
  Bottom Layer w30: R5.1 757.61,3749.76 1087.98,3749.76 1199.98,3637.76 1199.98,3478.76 1398.98,3279.76 v1(1398.98,3271.76) ; U4.7 1862.13,1617.13 R6.1
NetR7_1: R7.1 R8.1 U7.6 | length 2269.6
  Component Side w30: R7.1 1057.13,2290 1037.13,2310 1037.13,2423.64 1048.42,2434.93 1048.42,3636.86 R8.1
  Bottom Layer w30: U7.6 1001.98,1517.13 1011.98,1527.13 R7.1
NetR9_1: R9.1 R10.1 U7.7 | length 2501.4
  Component Side w30: R9.1 1006.98,3604.27 1006.98,2498.66 989.98,2481.66 925.98,2481.66 907.61,2463.28 907.61,2300.76 925.76,2282.6 989.98,2282.6 1006.98,2265.6 1006.98,1666.98 U7.7
  Bottom Layer w30: U7.7 1046.98,1617.13 1136.98,1527.13 R10.1
NetU1_2: U1.2 U5.4 | length 2712.6
  Component Side w30: U5.4 707.5,876.76 1450.98,876.76 1621.98,1047.76 1621.98,1976.76 1709.98,2064.76 1709.98,2547.15 U1.2
NetU1_5: U1.5 U7.1 | length 1441.8
  Component Side w30: U7.1 657.13,1884.91 v1(659.98,1887.76) ; v1(1386.98,1887.76) 1386.98,1947.76 1463.98,2024.76 1463.98,2085 1497.13,2118.15 1497.13,2204.27 U1.5
  Bottom Layer w30: v1(659.98,1887.76) v1(1386.98,1887.76)
NetU1_9: U1.9 U4.1 | length 984.5
  Bottom Layer w30: U4.1 1467.5,1666.76 1737.98,1666.76 1812.98,1741.76 1812.98,2120.11 U1.9
NetU1_12: U1.12
NetU4_3: U4.3 U8.2 | length 1866.7
  Component Side w30: U8.2 829.98,2632.13 837.61,2624.51 837.61,2230.6 855.6,2212.6 855.6,1637.15 925.98,1566.76 989.98,1566.76 1006.98,1549.76 1006.98,1503.76 1053.98,1456.76 1356.76,1456.76 U4.3
NetU7_3: U7.3 U8.4 | length 1028.7
  Component Side w30: U7.3 606.98,1567.28 606.98,2156.76 632.82,2182.6 685.98,2182.6 706.66,2203.28 706.66,2382.6 U8.4
PLC_BB: BeagleBoneBlack1.29 C11.2 | length 801.9
  Component Side w30: BeagleBoneBlack1.29 227.13,2227.13 227.13,2700.76 253.5,2727.13 443.71,2727.13 C11.2
PWM1: BeagleBoneBlack1.P46 U2.1 | length 1145.8
  Bottom Layer w30: U2.1 1182.2,2770 1266.97,2854.76 1960,2854.76 2030.32,2925.08 2054.37,2925.08 2056.42,2927.13 2127.13,2927.13 BeagleBoneBlack1.P46
PWM1_OUT: J5.2 U2.16 | length 3860.6
  Component Side w30: J5.2 2454.36,516.76 2703.98,516.76 2743.98,556.76 v1(2743.98,2513.76)
  Bottom Layer w30: U2.16 1516.22,2770 1527.98,2781.76 1972.35,2781.76 2026.98,2727.13 2530.61,2727.13 v1(2743.98,2513.76)
PWM2: BeagleBoneBlack1.P44 U2.2 | length 1145.8
  Bottom Layer w30: U2.2 1154.2,2670 1303.97,2819.76 1987.63,2819.76 1995,2827.13 2127.13,2827.13 BeagleBoneBlack1.P44
PWM2_OUT: J5.3 U2.15 | length 3782
  Component Side w30: U2.15 1354.1,2733.03 1354.1,3116.26 1391.6,3153.76 1457.9,3153.76 1824.23,2787.43 1824.23,2236.76 1874.98,2186.01 1874.98,2046.76 1903.98,2017.76 1903.98,1369.76 2018.98,1254.76 2018.98,1034.76 2026.61,1027.13 2205.98,1027.13 2227.98,1005.13 2227.98,455.38 J5.3
PWM3: BeagleBoneBlack1.P43 U2.3 | length 1254.9
  Component Side w30: v1(2010,2615) 2010,2745.82 1977.91,2777.91 BeagleBoneBlack1.P43
  Bottom Layer w30: U2.3 1292.13,2570 1337.13,2615 1492.74,2615 1525.14,2582.6 1945.51,2582.6 1977.91,2615 v1(2010,2615)
PWM3_OUT: J5.4 R1.1 U2.14 | length 5597.8
  Component Side w30: R1.1 239.98,4021.71 239.98,3113.91 327.13,3026.76 327.13,2874.61 v1(345.98,2855.76) ; v1(1336.98,1517.76) 1336.98,2057.76 1403.98,2124.76 1446.13,2124.76 1462.13,2140.76 1462.13,2396.61 1439.98,2418.76 1381.98,2418.76 1372.13,2428.61 1372.13,2525 U2.14 ; v1(1838.98,1363.76) 1903.98,1298.76 1903.98,900.78 2015,789.76 J5.4
  Bottom Layer w30: v1(345.98,2855.76) 346.48,2856.26 669.48,2856.26 709.98,2815.76 709.98,2554.76 749.98,2514.76 859.08,2514.76 925.98,2581.66 982.96,2581.66 1041.86,2522.76 1369.9,2522.76 U2.14 ; v1(1336.98,1517.76) 1336.98,1400.76 1373.98,1363.76 v1(1838.98,1363.76)
PWM4: BeagleBoneBlack1.P45 U2.4 | length 1448.6
  Component Side w30: v1(1109.98,2864.66) 1162.13,2812.51 1162.13,2515 U2.4
  Bottom Layer w30: v1(1109.98,2864.66) 1170.08,2924.76 1902.62,2924.76 1937.94,2960.08 2024.01,2960.08 2041.06,2977.13 BeagleBoneBlack1.P45
PWM4_OUT: J5.5 J15.3 U2.13 | length 5851.4
  Component Side w30: v1(1433.98,3048.76) 1433.98,2934.76 1497.98,2870.76 1497.98,2550.85 U2.13 1432.85,2454.28 1457.7,2454.28 1530.22,2381.76 1645.98,2381.76 1674.98,2410.76 1674.98,2460.76 1653.14,2482.6 1597.98,2482.6 1575.47,2505.11 1575.47,2659.15 1597.98,2681.66 1681.29,2681.66 1745.48,2617.47 1745.48,2151.26 1774.98,2121.76 1774.98,998.76 1825.98,947.76 1825.98,447.76 1850,447.76 J5.5
  Bottom Layer w30: J15.3 607.32,3907.1 491.98,3791.76 491.98,3625.76 509.98,3607.76 708.98,3607.76 761.98,3660.76 761.98,3694.69 781.98,3714.69 856.98,3714.69 896.56,3675.11 896.56,3644.76 921.75,3619.57 1008.98,3619.57 1264.69,3363.86 1264.69,3311.24 1442.68,3133.26 1442.68,3057.46 v1(1433.98,3048.76)
PWM5: BeagleBoneBlack1.P37 U2.5 | length 1083.3
  Bottom Layer w30: U2.5 1162.37,2324.76 1439.47,2324.76 1596.37,2481.66 1981.66,2481.66 BeagleBoneBlack1.P37
PWM5_OUT: J15.2 U2.12 | length 2902
  Component Side w30: v1(381.61,2777.13) 455.83,2851.35 455.83,4246.65 J15.2
  Bottom Layer w30: v1(381.61,2777.13) 381.61,2545.13 444.98,2481.76 701.98,2481.76 703.98,2479.76 911.98,2479.76 913.98,2481.76 1034.98,2481.76 1095.9,2420.85 1259.9,2420.85 1310.74,2370 U2.12
PWM6: J15.9 U2.6 | length 2893.2
  Component Side w30: v1(720,4500) 717.64,4497.64 717.64,4378.84 751.72,4344.76 861.98,4344.76 879.98,4326.76 879.98,4251.76 895.98,4235.76 895.98,3945.76 1126.53,3715.22 1126.53,3358.86 1083.42,3315.76 1083.42,2956.32 1197.13,2842.61 1197.13,2350 U2.6
  Bottom Layer w30: J15.9 456.66,4413.83 456.66,4435.85 509.98,4489.17 709.17,4489.17 v1(720,4500)
PWM6_OUT: BeagleBoneBlack1.P36 R11.1 U2.11 | length 3115.7
  Component Side w30: v1(1267.13,3153.76) 1267.13,2220.76 1291.13,2196.76 1343.9,2196.76 U2.11
  Bottom Layer w30: R11.1 408.27,3606.12 698.63,3315.76 1167.48,3315.76 1181.12,3302.13 1181.12,3239.78 v1(1267.13,3153.76) ; U2.11 1575.47,2270 1588.08,2282.6 1709.53,2282.6 1808.58,2381.66 2009.53,2381.66 2055,2427.13 2127.13,2427.13 BeagleBoneBlack1.P36
PWM7: J15.1 U2.7 | length 3242.4
  Component Side w30: v1(56.98,2412.76) 56.98,3956.86 J15.1
  Bottom Layer w30: v1(56.98,2412.76) 56.98,2297.13 126.98,2227.13 458.61,2227.13 503.98,2181.76 983.98,2181.76 995.74,2170 U2.7
PWM7_OUT: BeagleBoneBlack1.P38 R2.1 U2.10 | length 5553.7
  Bottom Layer w30: R2.1 895.98,4022.71 895.98,4092.76 917.98,4114.76 1206.98,4114.76 1320.98,4000.76 1320.98,3718.76 1327.98,3711.76 1430.94,3711.76 1661.98,3480.72 1762.86,3480.72 1829.82,3413.76 2555.98,3413.76 2778.98,3190.76 2778.98,2491.76 2765.98,2478.76 2646.98,2478.76 2605.98,2519.76 2506.98,2519.76 2402.98,2623.76 2223.76,2623.76 BeagleBoneBlack1.P38 2227.98,2526.28 2227.98,2348.76 2206.35,2327.13 2023.98,2327.13 1978.51,2281.66 1893.08,2281.66 1867.98,2306.76 1797.98,2306.76 1673.82,2182.6 1553.08,2182.6 1540.47,2170 U2.10
RAW: C11.1 J10.2 J15.8 L1.1 | length 7624.2
  Component Side w30: C11.1 558.98,2645.56 558.98,3324.76 741.98,3507.76 v1(741.98,4153.76) ; J15.8 1152.6,3804.15 1345.08,3611.66 1426.66,3611.66 1468.32,3570 v1(1470,3570) ; J10.2 1889.82,3445.6 2096.98,3652.76 2237.98,3652.76 2286.98,3603.76 2286.98,3529.76 2456.98,3359.76 2456.98,2055.76 2317.13,1915.91 2317.13,1196.86 2360,1153.99 2360,1096.01 2325,1061.01 2325,1012.63 2318.15,1005.78 2318.15,811.6 2559.74,570 L1.1
  Bottom Layer w30: v1(741.98,4153.76) 772.98,4184.76 1048.27,4184.76 J15.8 ; v1(1470,3570) 1653.39,3386.61 1784.13,3386.61 1830.67,3375.76 J10.2
"SYS 5V": BeagleBoneBlack1.7 BeagleBoneBlack1.8 U3.3 U5.3 | length 1302.4
  Bottom Layer w30: BeagleBoneBlack1.7 BeagleBoneBlack1.8 327.13,1027.13 U5.3 821.03,1027.13 871.4,976.76 1161.98,976.76 1212.35,1027.13 U3.3
pads on no net: BeagleBoneBlack1.15 BeagleBoneBlack1.16 BeagleBoneBlack1.17 BeagleBoneBlack1.18 BeagleBoneBlack1.25 BeagleBoneBlack1.27 BeagleBoneBlack1.28 BeagleBoneBlack1.30 BeagleBoneBlack1.31 BeagleBoneBlack1.32 BeagleBoneBlack1.33 BeagleBoneBlack1.34 BeagleBoneBlack1.35 BeagleBoneBlack1.36 BeagleBoneBlack1.37 BeagleBoneBlack1.38 BeagleBoneBlack1.39 BeagleBoneBlack1.40 BeagleBoneBlack1.41 BeagleBoneBlack1.42 BeagleBoneBlack1.J1-2 BeagleBoneBlack1.J1-3 BeagleBoneBlack1.J1-6 BeagleBoneBlack1.P3 BeagleBoneBlack1.P4 BeagleBoneBlack1.P5 BeagleBoneBlack1.P6 BeagleBoneBlack1.P7 BeagleBoneBlack1.P8 BeagleBoneBlack1.P9 BeagleBoneBlack1.P10 BeagleBoneBlack1.P11 BeagleBoneBlack1.P12 BeagleBoneBlack1.P13 BeagleBoneBlack1.P14 BeagleBoneBlack1.P15 BeagleBoneBlack1.P16 BeagleBoneBlack1.P17 BeagleBoneBlack1.P18 BeagleBoneBlack1.P19 BeagleBoneBlack1.P20 BeagleBoneBlack1.P21 BeagleBoneBlack1.P22 BeagleBoneBlack1.P23 BeagleBoneBlack1.P24 BeagleBoneBlack1.P25 BeagleBoneBlack1.P26 BeagleBoneBlack1.P27 BeagleBoneBlack1.P28 BeagleBoneBlack1.P29 BeagleBoneBlack1.P30 BeagleBoneBlack1.P31 BeagleBoneBlack1.P32 BeagleBoneBlack1.P33 BeagleBoneBlack1.P34 BeagleBoneBlack1.P35 BeagleBoneBlack1.P39 BeagleBoneBlack1.P40 BeagleBoneBlack1.P41 BeagleBoneBlack1.P42 BeagleBoneBlack1.TP1 BeagleBoneBlack1.TP4 BeagleBoneBlack1.TP5 BeagleBoneBlack1.TP6 BeagleBoneBlack1.TP7 BeagleBoneBlack1.TP8 J5.0 J10.0 J10.10 J15.16 J15.17 P1.2 P1.3 P1.6 U8.5 U8.6 U8.8 U8.9 U8.10 U8.11 U8.12 U8.13

## Keep-outs
Keep-Out Layer:
  lines w5: 1532.15,3931.45 ccw(c1678.95,3933.94) 1681.44,3787.14 1681.45,3787.13 2708.81,3787.13 cw(c2708.5,3685.75) 2809.89,3685.44 2809.89,196.07 cw(c2613.04,196.07) 2613.04,-0.78 1725.78,-0.78 cw(c1725.78,80.77) 1644.23,80.77 1644.23,719.01 ccw(c1544.23,719.01) 1544.23,819.01 1013.23,819.01 ccw(c1013.17,717.07) 911.23,717.13 911.23,76.23 cw(c835,76.23) 835,0 0.17,0 cw(c0.17,143.03) -142.87,143.03 -142.87,4631.31 cw(c-49.77,4631.31) -49.77,4724.41 1444.44,4724.41 cw(c1444.44,4636.71) 1532.13,4636.71 1532.13,3931.45 ; 1532.13,3931.45 1532.15,3931.45

## Silkscreen, mask and mechanical layers (free items; w line width, h text height)
Top Overlay:
  text "VBatt+" at -130,3755 h40
  text "COM" at -23.37,3652.5 h40
  text "Debug Header" at 1257.13,3597.13 h40 r90
  text "5.0V" at -56.69,3550 h40
  text "GND" at 1327.13,3447.13 h40
  text "1939H" at 1993.73,3227.01 h30
  text "LIN" at 2350.23,3224.01 h30
  text "GND" at 1679.23,3223.01 h30
  text "+12V" at 1845.48,3223.01 h30
  text "1939L" at 2179.98,3223.01 h30
  text "CAN2H" at 1992.73,3164.01 h30
  text "IGN" at 2349.23,3161.01 h30
  text "1708+" at 1678.23,3160.01 h30
  text "1708-" at 1844.48,3160.01 h30
  text "CAN2L" at 2178.98,3160.01 h30
  text "Female HDR" at 502.13,1757.13 h40 r90
Bottom Overlay:
  text "E1708-" at 680,4585 h25 r90
  text "1939H" at 900,4585 h30 r90
  text "1708-" at 1005,4585 h30 r90
  text "1708+" at 1120,4585 h30 r90
  text "1939L" at 785,4580 h30 r90
  text "CAN2L" at 556.23,4565.01 h30 r90
  text "IGN" at 455,4525 h30 r90
  text "Truck Cape - Colorado State University - J. Daily - August 2020, Rev 4" at -15,4305 h60 r90
  text "E1708+" at 685,4255 h30 r90
  text "CAN2H" at 800,4250 h30 r90
  text "+12V" at 1170,4240 h30 r90
  text "+12V" at 409.23,4222 h30 r90
  text "IGN" at 502.23,4222 h30 r90
  text "GND" at 1020.23,4192.01 h30
  text "TX" at 1335,3945 h40
  text "RX" at 1320,3840 h40
  text "Fits Hammond Mfg. 1455K120 Extruded Aluminum Case" at 2745.02,3475.76 h60 r90
  text "GND" at 1412.13,3432.13 h40
  text "1939H" at 2134.69,3225.01 h30
  text "GND" at 1762.19,3223.01 h30
  text "+12V" at 1948.44,3223.01 h30
  text "1939L" at 2305.94,3223.01 h30
  text "GND" at 2422.19,3223.01 h30
  text "CAN2H" at 2135.69,3162.01 h30
  text "1708+" at 1763.19,3160.01 h30
  text "1708-" at 1949.44,3160.01 h30
  text "CAN2L" at 2306.94,3160.01 h30
  text "IGN" at 2419.21,3160.01 h30
  text "GND" at 574.93,1655 h40
  text "PWM3" at 1858.26,307.5 h40
  text "PWM2" at 2065,302.5 h40
  text "PWM1" at 2238.26,302.5 h40
  text "COM" at 2403.26,302.5 h40
  text "COM" at 2563.26,297.5 h40

## Dimensions
2367.13,1565 to 2563.98,1565 on Mechanical 1
2355,2450 to 2555,2450 on Mechanical 1
1444.44,4724.41 to 1532.13,3931.45 on Mechanical 1
-142.87,4631.31 to 1532.13,4636.71 on Mechanical 1
-49.77,4724.41 to -142.87,143.03 on Mechanical 1
-142.87,143.03 to 101.63,252.13 on Mechanical 1

## Text inside footprints (layer, text, board x,y; h text height)
BeagleBoneBlack1: Top Overlay "TP4" at 828.13,319.63 h40 r270; Top Overlay "TP1" at 497.13,2472.13 h40 r270; Top Overlay "J1-6" at 371.13,2366.63 h40 r270; Top Overlay "J1-1" at 378.13,1609.63 h40 r270; Top Overlay "BAT" at 585.13,624.63 h40 r270; Top Overlay "SENSE" at 402.13,520.63 h40 r270; Top Overlay "GND" at 395.13,842.63 h40 r270; Top Overlay "TS" at 506.83,840.63 h40 r270; Top Overlay "P8" at 2240,3039.13 h40 r270; Top Overlay "46" at 2125,3100 h40 r270; Top Overlay "1" at 2030.13,714.63 h40 r270; Top Overlay "2" at 2166.13,717.63 h40 r270; Top Overlay "46" at 263.13,3099.63 h40 r270; Top Overlay "45" at 143.13,3105.63 h40 r270; Top Overlay "2" at 264.13,717.63 h40 r270; Top Overlay "1" at 150.13,712.63 h40 r270; Top Overlay "BB USB" at 727.13,3356.63 h60 r270; Top Overlay "P9" at 202.13,3149.63 h40 r270; Top Overlay "5V Jack" at 502.13,460.63 h60 r270; Bottom Overlay "TP4" at 828.13,224.03 h40 r270; Bottom Overlay "TP1" at 502.13,2407.13 h40 r270; Bottom Overlay "J1-6" at 382.13,2239.63 h40 r270; Bottom Overlay "J1-1" at 380.13,1496.37 h40 r270; Bottom Overlay "BAT" at 507.13,410.63 h40 r270; Bottom Overlay "SENSE" at 407.13,340.63 h40 r270; Bottom Overlay "GND" at 395.13,748.94 h40 r270; Bottom Overlay "TS" at 510.13,743.63 h40 r270; Bottom Overlay "2" at 2178.13,686.97 h40 r270; Bottom Overlay "1" at 2042.13,689.97 h40 r270; Bottom Overlay "P8" at 1979.13,2949.13 h40 r270; Bottom Overlay "46" at 2142.13,3039.13 h40 r270; Bottom Overlay "P9" at 203.13,3100.63 h40 r270; Bottom Overlay "2" at 275.13,689.63 h40 r270; Bottom Overlay "46" at 267.13,3038.63 h40 r270; Bottom Overlay "1" at 157.13,699.63 h40 r270; Bottom Overlay "45" at 149.13,3038.97 h40 r270
C7: Top Overlay "+" at 2703.98,1292.13 h40 r180; Top Overlay "-" at 2248.98,1292.13 h40 r180; Bottom Overlay "-" at 2323.98,1292.13 h40 r180; Bottom Overlay "+" at 2643.98,1292.13 h40 r180
C8: Top Overlay "+" at 2705,885 h40 r180; Top Overlay "-" at 2250,885 h40 r180; Bottom Overlay "-" at 2325,885 h40 r180; Bottom Overlay "+" at 2645,885 h40 r180
J5: Top Overlay "1" at 2610,382.4 h60; Top Overlay "5" at 1735,387.4 h60
J10: Top Overlay "1" at 1624.82,3341.61 h60 r180; Top Overlay "6" at 1624.82,3136.61 h60 r180; Top Overlay "Molex 39-30-1100" at 2437.23,3460.01 h50 r180
J15: Top Overlay "D15S33E4GX00LF" at 482.28,4519.6 h50; Bottom Overlay "8" at 1243.91,4262.02 h40; Bottom Overlay "15" at 1230.91,4382.02 h40; Bottom Overlay "1" at 317.28,4276.6 h40; Bottom Overlay "9" at 368.91,4386.02 h40; Mechanical 1 "edge" at 1390.91,4664.02 h40; Mechanical 1 "edge" at 0.91,4664.02 h40
U6: Top Overlay "Vin" at 2688.28,1740.13 h40; Top Overlay "TAB" at 2412.28,2282.13 h40; Top Overlay "GND" at 2417.28,1648.13 h40